# Altium PCB PCB1.pcbdoc
Units mil, origin at the board's own origin, x right, y up, seen from the top; angles counter-clockwise.
Board outline 1968.5 x 1968.5 mil, 2 copper layers (Top Layer, Bottom Layer); 70 components, 64 nets, 269 pads, 219 vias.
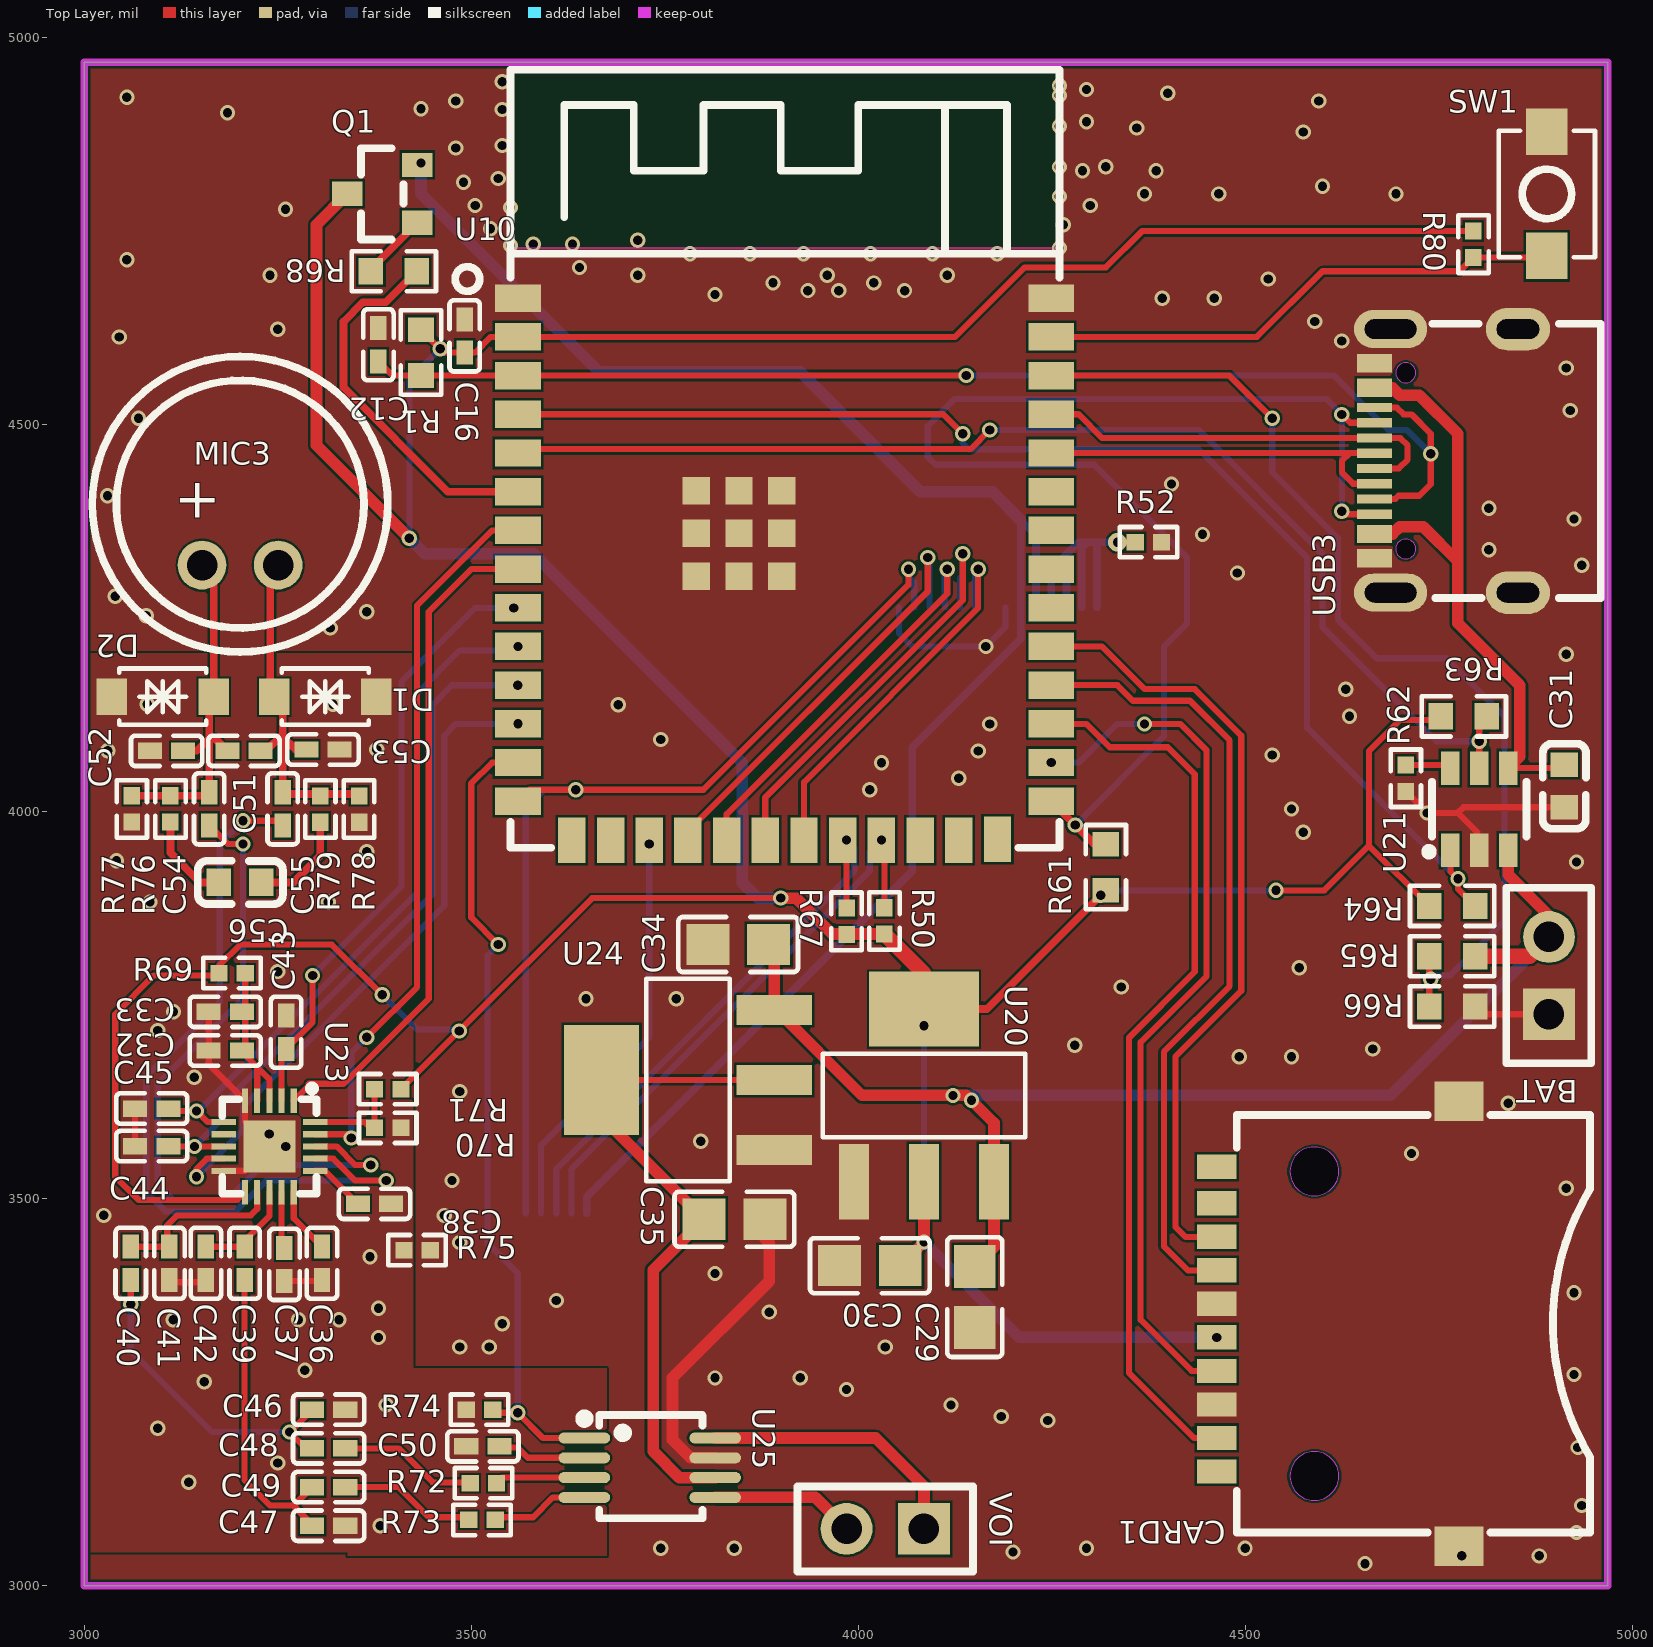
[diagram p0: Top Layer view]
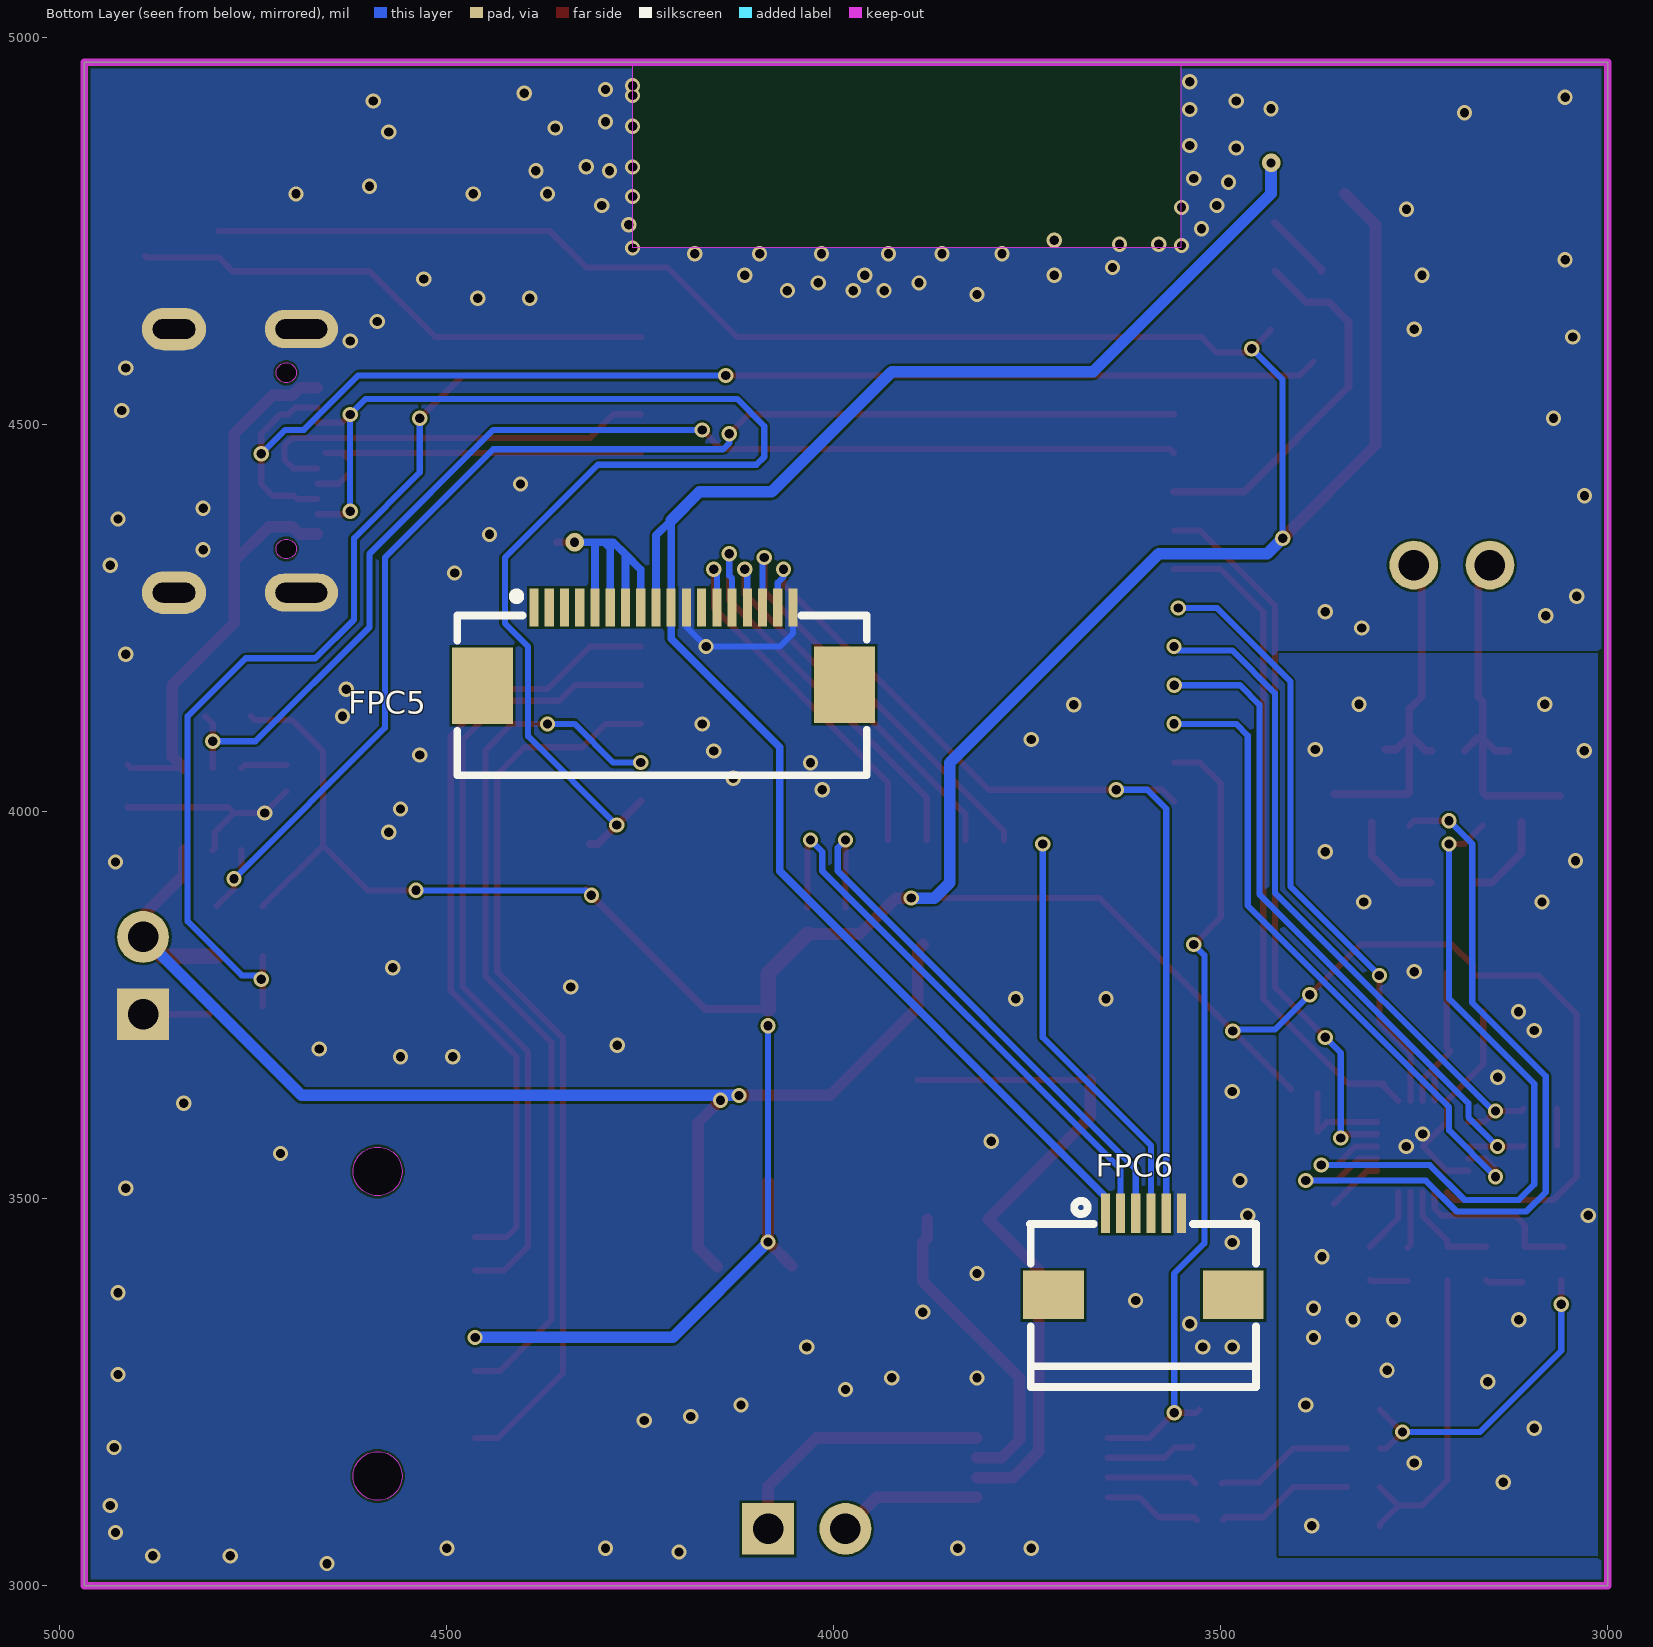
[diagram p1: Bottom Layer view, seen from below]

## Layer stack, top to bottom
Top Solder Mask Layer: solder mask 0.4, Solder Resist, Dk 3.5
Top Layer: signal copper 1.4
Dielectric1: dielectric 12.6, FR-4, Dk 4.8
Bottom Layer: signal copper 1.4
Bottom Solder Mask Layer: solder mask 0.4, Solder Resist, Dk 3.5

## Board outline
3000,3000 4968.5,3000 4968.5,4968.5 3000,4968.5

## Design rules (kind name [scope] priority, off if disabled: settings)
Clearance [All] p1: gap=3 ignorepadtopadclearanceinfootprint=FALSE
ComponentClearance [All] p1: gap=0 collisioncheckmode=3 verticalgap=0 showdistances=TRUE
PolygonConnect PolygonConnect_1 [All vs IsNamedPolygon('Top Layer-GND') Or  IsNamedPolygon('Bottom Layer-GND') Or  IsNamedPolygon('Top Layer-AGND 1') Or  IsNamedPolygon('Bottom Layer-AGND') Or  IsNamedPolygon('Top Layer-AGND')] p1: connectstyle=Direct reliefconductorwidth=10 reliefentries=4 polygonreliefangle="90 Angle" airgapwidth=10
PolygonConnect [All] p2: connectstyle=Relief reliefconductorwidth=10 reliefentries=4 polygonreliefangle="90 Angle" airgapwidth=10
RoutingVias [All] p1: holewidth=28 width=50 viastyle="Through Hole" minholewidth=12 minwidth=12 maxholewidth=28 maxwidth=50
SilkToSilkClearance [All] p1: silktosilkclearance=3
SolderMaskExpansion [All] p1: expansion=4
Width [All] p1: maxlimit=30 minlimit=5 preferedwidth=10
28 further rules are at their usual default settings.

## Components (designator, comment, footprint, x,y, rotation, side; value= is the part's Value field where it differs from the comment)
BAT "HDR-F_2.54_1x2P" HDR-TH_2P-P2.54-V-F 4892.61,3788.39 r90 top
C12 "CL05B104KO5NNNC" C0402 3380,4603.5 r90 top
C16 "CL05B104KO5NNNC" C0402 3491.46,4614.96 r270 top
C29 "0805B104K500NT" C0805 4150.63,3372.87 r90 top
C30 "0805B104K500NT" C0805 4015,3413.5 r0 top
C31 "CAP_0603" C0603 4912.61,4033.39 r90 top
C32 "CAP_0402" C0402 3182.14,3691.58 r180 top
C33 "CAP_0402" C0402 3182.14,3741.58 r180 top
C34 "0805B104K500NT" C0805 3845,3828.5 r0 top
C35 "0805B104K500NT" C0805 3840,3473.5 r180 top
C36 "CAP_0402" C0402 3307.14,3416.58 r270 top
C37 "CAP_0402" C0402 3258.6,3415.12 r270 top
C38 "CAP_0402" C0402 3375,3493.5 r0 top
C39 "CAP_0402" C0402 3207.14,3416.58 r270 top
C40 "CAP_0402" C0402 3060,3416.58 r270 top
C41 "CAP_0402" C0402 3110,3416.58 r90 top
C42 "CAP_0402" C0402 3157.14,3416.58 r90 top
C43 "CAP_0402" C0402 3260.68,3715.12 r90 top
C44 "CAP_0402" C0402 3087.14,3568.04 r0 top
C45 "CAP_0402" C0402 3087.14,3616.58 r0 top
C46 "CAP_0402" C0402 3315.7,3227.44 r180 top
C47 "CAP_0402" C0402 3315.7,3077.44 r180 top
C48 "CAP_0402" C0402 3315.7,3177.44 r0 top
C49 "CAP_0402" C0402 3315.7,3127.44 r0 top
C50 "CAP_0402" C0402 3515.02,3180.07 r0 top
C51 "CAP_0402" C0402 3206.3,4078.79 r180 top
C52 "CAP_0402" C0402 3106.3,4078.79 r180 top
C53 "CAP_0402" C0402 3308.42,4080.53 r180 top
C54 "CAP_0402" C0402 3161.3,4003.79 r90 top
C55 "CAP_0402" C0402 3256.3,4003.79 r90 top
C56 "CAP_0402" C0603 3201.3,3908.79 r180 top
CARD1 "SD-111" SD-SMD_SD-01A 4620,3338.5 r90 top
D1 "SMFJ3.3CA" SOD-123_L2.7-W1.6-LS3.7-BI 3311.3,4148.79 r180 top
D2 "SMFJ3.3CA" SOD-123_L2.7-W1.6-LS3.7-BI 3101.3,4148.79 r180 top
FPC5 "FPC-05F-18PH20" FPC-SMD_18P-P0.50_FPC-05F-18PH20 4220,4213.5 r180 bottom
FPC6 "AFC01-S06FCA-00" FPC-SMD_P0.50-6P_AFC01-S06FCA-00 3600,3428.5 r180 bottom
MIC3 "GMI9750UP-2C40DB" MIC-TH_BD9.7-P2.50-D0.8-L-FD 3201.3,4318.79 r0 top
Q1 "S8050_SOT_NPN" S8050_SOT-23 3385,4793.5 r0 top
R1 "0603WAF1002T5E" R0603 3435,4593.5 r90 top
R50 "0402WGF4701TCE" R0402 4033.9,3859.09 r270 top
R52 "0402WGF100JTCE" R0402 4375,4348.5 r0 top
R61 "0603WAF1002T5E" R0603 4320,3928.5 r90 top
R62 "Res_0402" R0402 4707.61,4043.39 r270 top
R63 "Res_0603" R0603 4782.61,4123.39 r180 top
R64 "Res_0603" R0603 4767.61,3878.39 r180 top
R65 "Res_0603" R0603 4767.61,3813.39 r0 top
R66 "Res_0603" R0603 4767.61,3748.39 r0 top
R67 "0402WGF4701TCE" R0402 3985,3858.5 r270 top
R68 "Res_0603" R0603 3400,4698.5 r180 top
R69 "Res_0402" R0402 3190.98,3791.58 r0 top
R70 "Res_0402" R0402 3392.14,3591.58 r0 top
R71 "Res_0402" R0402 3392.14,3641.58 r180 top
R72 "Res_0402" R0402 3515.7,3132.44 r0 top
R73 "Res_0402" R0402 3513.89,3085.02 r0 top
R74 "Res_0402" R0402 3510.7,3227.44 r0 top
R75 "Res_0402" R0402 3430,3433.5 r0 top
R76 "Res_0402" R0402 3111.3,4003.79 r270 top
R77 "Res_0402" R0402 3061.3,4003.79 r270 top
R78 "Res_0402" R0402 3355,4003.5 r270 top
R79 "Res_0402" R0402 3305,4003.5 r270 top
R80 "Res_0402" R0402 4795,4733.5 r270 top
SW1 "Key_SMD_3x4x2" Key_SMD_3x4x2 4890,4798.5 r90 top
U10 "ESP32-S3-WROOM-1-N16R8" WIRELM-SMD_ESP32-S3-WROOM-1 3905,4313.5 r0 top (schematic designator U1)
U20 "AMS1117-3.3_C347222" SOT-223-4_L6.5-W3.5-P2.30-LS7.0-BR 4085,3633.5 r270 top
U21 "TP4057" SOT-23-6_L2.9-W1.6-P0.95-LS2.8-BR 4802.61,4003.39 r270 top
U23 "ES8311" WQFN-20_L3.0-W3.0-P0.40-BL-EP1.7 3239.15,3567.55 r180 top
U24 "AMS1117-3.3_C347222" SOT-223-4_L6.5-W3.5-P2.30-LS7.0-BR 3780,3653.5 r0 top
U25 "NS4150B_C189961" MSOP-8_L3.0-W3.0-P0.65-LS5.0-BL 3730.7,3152.44 r270 top
USB3 "TYPE-C16P3MDDGP073" USB-SMD_TYPE-C16PIN-1 4760,4453.5 r90 top
VOI "HDR-F_2.54_1x2P" HDR-TH_2P-P2.54-V-F 4035,3073.5 r180 top

## Footprints (in the part's own frame and the unit in brackets; to place one, negate y for a bottom-side part, rotate by r counter-clockwise, add the part's x,y. Pads: shape width x height; smd on the part's side, far side on the other; paste and mask are expansions set on the pad)
C0402 [mm]
  rect 0.79x0.54 smd paste-100 mask+0.051: 1(-0.545,0) 2(0.545,0)
  silkscreen extent -1.17,-0.5 1.17,0.5
C0603 [mm]
  rect 0.8x0.9 smd: 1(-0.7,0) 2(0.7,0)
  silkscreen extent -1.41,-0.71 1.39,0.72
C0805 [mm]
  rect 1.41x1.35 smd paste-100 mask+0.051: 1(-1,0) 2(1,0)
  silkscreen extent -1.96,-0.9 1.96,0.9
FPC-SMD_18P-P0.50_FPC-05F-18PH20 [mm]
  rect 0.3x1.25 smd paste+0 mask+0.05: 1(-4.25,1.288) 2(-3.75,1.288) 3(-3.25,1.288) 4(-2.75,1.288) 5(-2.25,1.288) 6(-1.75,1.288) 7(-1.25,1.288) 8(-0.75,1.288) 9(-0.25,1.288) 10(0.25,1.288) 11(0.75,1.288) 12(1.25,1.288) 13(1.75,1.287) 14(2.25,1.287) 15(2.75,1.287) 16(3.25,1.287) 17(3.75,1.287) 18(4.25,1.287)
  rect 2x2.5 smd paste+0 mask+0.05: 19(-5.94,-1.288) 20(5.94,-1.252)
  silkscreen extent -6.77,-4.22 6.67,1.78
FPC-SMD_P0.50-6P_AFC01-S06FCA-00 [mm]
  rect 0.3x1.3 smd: 1(-1.248,1.339) 2(-0.748,1.339) 3(-0.248,1.339) 4(0.252,1.339) 5(0.752,1.339) 6(1.252,1.339)
  rect 2x1.6 smd: 7(-2.95,-1.339) 8(2.95,-1.339)
  silkscreen extent -3.72,-4.36 3.7,1.75
HDR-TH_2P-P2.54-V-F [mm]
  rect 1.7x1.7 hole 1: 1(-1.27,0)
  round 1.7 hole 1: 2(1.27,0)
  silkscreen extent -2.88,-1.39 2.88,1.4
Key_SMD_3x4x2 [mm]
  rect 1.53x1.36 smd paste+0 mask+0.051: 1(-2.035,0) 2(2.035,0)
  silkscreen extent -2.08,-1.58 2.08,1.58
MIC-TH_BD9.7-P2.50-D0.8-L-FD [mm]
  round 1.6 hole 1: 1(-1.25,0) 2(1.25,0)
  silkscreen extent -4.85,-2.85 4.85,6.85
MSOP-8_L3.0-W3.0-P0.65-LS5.0-BL [mil]
  oval 14.33x66.61 smd: 1(-38.39,-84.49) 2(-12.79,-84.49) 3(12.8,-84.49) 4(38.39,-84.49) 5(38.39,84.49) 6(12.8,84.49) 7(-12.79,84.49) 8(-38.39,84.49)
  silkscreen extent -69,-90 65,68
R0402 [mm]
  rect 0.566x0.54 smd paste-100 mask+0.051: 1(-0.433,0) 2(0.433,0)
  silkscreen extent -0.94,-0.5 0.94,0.5
R0603 [mil]
  rect 31.75x34.02 smd paste-3937.01 mask+2: 1(-29.66,0) 2(29.66,0)
  silkscreen extent -55,-26 55,26
S8050_SOT-23 [mm]
  rect 1x0.8 smd paste+0 mask+0.051: 1(1.15,-0.823) 2(1.15,1.077) 3(-1.15,0.127)
  silkscreen extent -0.7,-1.37 0.7,1.63
SD-SMD_SD-01A [mm]
  rect 0.8x1.3 smd: 1(2.85,3.975) 2(1.75,3.975) 3(0.65,3.975) 4(-0.45,3.975) 5(-1.55,3.975) 6(-2.65,3.975) 7(-3.75,3.975) 8(-4.85,3.975) SW1(3.95,3.975) SW2(5.15,3.975)
  rect 1.3x1.6 smd: 11(7.3,-3.975) 12(-7.3,-3.975)
  Board Outline Layer board cut-out: -5,-0.025 -4.895,-0.024 -4.693,0.031 -4.511,0.137 -4.363,0.285 -4.259,0.467 -4.205,0.67 -4.205,0.88 -4.259,1.083 -4.363,1.265 -4.511,1.414 -4.693,1.519 -4.895,1.574 -5,1.575 -5.105,1.574 -5.307,1.519 -5.489,1.414 -5.637,1.265 -5.741,1.083 -5.796,0.88 -5.796,0.67 -5.741,0.467 -5.637,0.285 -5.489,0.137 -5.307,0.031 -5.105,-0.024 -5,-0.025
  Board Outline Layer board cut-out: 5,-0.025 5.105,-0.024 5.307,0.031 5.489,0.137 5.637,0.285 5.741,0.467 5.795,0.67 5.795,0.88 5.741,1.083 5.637,1.265 5.489,1.414 5.307,1.519 5.105,1.574 5,1.575 4.895,1.574 4.692,1.519 4.511,1.414 4.363,1.265 4.259,1.083 4.204,0.88 4.204,0.67 4.259,0.467 4.363,0.285 4.511,0.137 4.693,0.031 4.895,-0.024 5,-0.025
  Multi-Layer keep-out region: -5,-0.025 -4.895,-0.024 -4.693,0.031 -4.511,0.137 -4.363,0.285 -4.259,0.467 -4.205,0.67 -4.205,0.88 -4.259,1.083 -4.363,1.265 -4.511,1.414 -4.693,1.519 -4.895,1.574 -5,1.575 -5.105,1.574 -5.307,1.519 -5.489,1.414 -5.637,1.265 -5.741,1.083 -5.796,0.88 -5.796,0.67 -5.741,0.467 -5.637,0.285 -5.489,0.137 -5.307,0.031 -5.105,-0.024 -5,-0.025
  Multi-Layer keep-out region: 5,-0.025 5.105,-0.024 5.307,0.031 5.489,0.137 5.637,0.285 5.741,0.467 5.795,0.67 5.795,0.88 5.741,1.083 5.637,1.265 5.489,1.414 5.307,1.519 5.105,1.574 5,1.575 4.895,1.574 4.692,1.519 4.511,1.414 4.363,1.265 4.259,1.083 4.204,0.88 4.204,0.67 4.259,0.467 4.363,0.285 4.511,0.137 4.693,0.031 4.895,-0.024 5,-0.025
  silkscreen extent -6.85,-8.28 6.85,3.32
SOD-123_L2.7-W1.6-LS3.7-BI [mm]
  rect 1x1.2 smd: 1(-1.675,0) 2(1.675,0)
  silkscreen extent -1.43,-0.93 1.43,0.93
SOT-23-6_L2.9-W1.6-P0.95-LS2.8-BR [mm]
  rect 1.1x0.6 smd paste+0 mask+0.051: 1(1.35,-0.95) 2(1.35,0) 3(1.35,0.95) 4(-1.35,0.95) 5(-1.35,0) 6(-1.35,-0.95)
  silkscreen extent -0.9,-1.78 1.52,1.55
SOT-223-4_L6.5-W3.5-P2.30-LS7.0-BR [mm]
  rect 2.47x0.98 smd: 1(2.835,-2.3) 2(2.835,0) 3(2.835,2.3)
  rect 2.47x3.6 smd: 4(-2.835,0)
  silkscreen extent -1.37,-3.33 1.37,3.33
USB-SMD_TYPE-C16PIN-1 [mm]
  oval 1.25x2.4 hole 0.65 slot 1.7 at 90 deg paste+0 mask+0.05: 17(-4.325,1.828) 18(4.325,1.828)
  oval 1.4x2.1 hole 0.65 slot 1.4 at 90 deg paste+0 mask+0.05: 19(-4.325,-2.353) 20(4.325,-2.353)
  rect 0.6x1.15 smd paste-100 mask+0.051: A1B12(-3.2,2.353) A4B9(-2.4,2.353) B1A12(3.2,2.353) B4A9(2.4,2.353)
  rect 0.3x1.15 smd paste-100 mask+0.051: A5(-1.25,2.353) A6(-0.25,2.353) A7(0.25,2.353) A8(1.25,2.353) B5(1.75,2.353) B6(0.75,2.353) B7(-0.75,2.353) B8(-1.75,2.353)
  Board Outline Layer board cut-out: 2.89,1.003 2.955,1.003 3.074,1.052 3.166,1.144 3.215,1.263 3.215,1.392 3.165,1.512 3.074,1.603 2.955,1.653 2.89,1.653 2.825,1.653 2.706,1.603 2.614,1.512 2.565,1.392 2.565,1.263 2.614,1.144 2.706,1.052 2.825,1.003 2.89,1.003
  Board Outline Layer board cut-out: -2.89,1.003 -2.825,1.003 -2.706,1.052 -2.615,1.144 -2.565,1.263 -2.565,1.392 -2.615,1.512 -2.706,1.603 -2.825,1.653 -2.89,1.653 -2.955,1.653 -3.074,1.603 -3.166,1.512 -3.215,1.392 -3.215,1.263 -3.166,1.144 -3.074,1.052 -2.955,1.003 -2.89,1.003
  Multi-Layer keep-out region: 2.89,1.003 2.955,1.003 3.074,1.052 3.166,1.144 3.215,1.263 3.215,1.392 3.165,1.512 3.074,1.603 2.955,1.653 2.89,1.653 2.825,1.653 2.706,1.603 2.614,1.512 2.565,1.392 2.565,1.263 2.614,1.144 2.706,1.052 2.825,1.003 2.89,1.003
  Multi-Layer keep-out region: -2.89,1.003 -2.825,1.003 -2.706,1.052 -2.615,1.144 -2.565,1.263 -2.565,1.392 -2.615,1.512 -2.706,1.603 -2.825,1.653 -2.89,1.653 -2.955,1.653 -3.074,1.603 -3.166,1.512 -3.215,1.392 -3.215,1.263 -3.166,1.144 -3.074,1.052 -2.955,1.003 -2.89,1.003
  silkscreen extent -4.5,-5.07 4.5,0.47
WIRELM-SMD_ESP32-S3-WROOM-1 [mm]
  rect 1.5x0.9 smd paste+0 mask+0.05: 1(-8.75,8.895) 2(-8.75,7.625) 3(-8.75,6.355) 4(-8.75,5.085) 5(-8.75,3.815) 6(-8.75,2.545) 7(-8.75,1.275) 8(-8.75,0.005) 9(-8.75,-1.265) 10(-8.75,-2.535) 11(-8.75,-3.805) 12(-8.75,-5.075) 13(-8.75,-6.345) 14(-8.75,-7.615) 27(8.75,-7.615) 28(8.75,-6.345) 29(8.75,-5.075) 30(8.75,-3.805) 31(8.75,-2.535) 32(8.75,-1.265) 33(8.75,0.005) 34(8.75,1.275) 35(8.75,2.545) 36(8.75,3.815) 37(8.75,5.085) 38(8.75,6.355) 39(8.75,7.625) 40(8.75,8.895)
  rect 0.9x1.5 smd paste+0 mask+0.05: 15(-6.985,-8.895) 16(-5.715,-8.895) 17(-4.445,-8.895) 18(-3.175,-8.895) 19(-1.905,-8.895) 20(-0.635,-8.895) 21(0.635,-8.895) 22(1.905,-8.895) 23(3.175,-8.895) 24(4.445,-8.895) 25(5.715,-8.895) 26(6.985,-8.865)
  rect 0.9x0.9 smd: 41(-2.9,-0.225) 41(-2.9,1.175) 41(-2.9,2.575) 41(-1.5,-0.225) 41(-1.5,1.175) 41(-1.5,2.575) 41(-0.1,-0.225) 41(-0.1,1.175) 41(-0.1,2.575)
  silkscreen extent -10.81,-9.14 9.02,16.39
WQFN-20_L3.0-W3.0-P0.40-BL-EP1.7 [mm]
  rect 0.2x0.8 smd paste-100 mask+0.051: 1(-0.8,-1.5) 2(-0.4,-1.5) 3(0,-1.5) 4(0.4,-1.5) 5(0.8,-1.5) 11(0.8,1.5) 12(0.4,1.5) 13(0,1.5) 14(-0.4,1.5) 15(-0.8,1.5)
  rect 0.8x0.2 smd paste-100 mask+0.051: 6(1.5,-0.8) 7(1.5,-0.4) 8(1.5,0) 9(1.5,0.4) 10(1.5,0.8) 16(-1.5,0.8) 17(-1.5,0.4) 18(-1.5,0) 19(-1.5,-0.4) 20(-1.5,-0.8)
  rect 1.7x1.7 smd paste-100 mask+0.051: 21(0,0)
  silkscreen extent -1.55,-2 1.55,1.55

## Via types
v1: diameter 19.7, hole 12, Top Layer to Bottom Layer, 216 vias
v2: diameter 24, hole 12, Top Layer to Bottom Layer, 2 vias
v3: diameter 19.68, hole 12, Top Layer to Bottom Layer, 1 vias

## Nets (pads, with @x,y where several pads share a name; then routed paths per layer and width w, separated by ;. In a path a pad name is that pad's centre, name@x,y a point inside that pad or via, vN(x,y) a via of type N, cw(c..) or ccw(c..) an arc to the next point about the centre after c; other vN are vias at no path point)
$1N2727: FPC5.5 FPC5.6 FPC5.7 FPC5.8 R52.1 | length 412.7
  Top Layer w10: v2(4335,4348.5) R52.1
  Bottom Layer w10: FPC5.8 4249.53,4313.03 4269.21,4332.71 ; FPC5.7 4269.21,4332.71 ; FPC5.6 4288.9,4340.76 4296.64,4348.5 ; FPC5.5 4308.58,4347.6 4309.48,4348.5 ; v2(4335,4348.5) 4309.48,4348.5 ; 4269.21,4332.71 4285,4348.5 4296.64,4348.5 ; 4296.64,4348.5 4309.48,4348.5
$1N4323: R62.1 U21.6 | length 59.2
  Top Layer w8: R62.1 4761.32,4060.43 U21.6
$1N5174: Q1.1 R68.2 | length 87.4
  Top Layer w10: R68.2 3370.34,4701.17 Q1.1
$1N5941: C32.1 C33.1 R69.2 U23.3 U23.4 | length 225
  Top Layer w8: R69.2 3208.02,3695.99 C32.1 3203.6,3689.9 3223.39,3670.11 ; U23.4 3223.39,3670.11 ; U23.3 3239.14,3654.36 3223.39,3670.11
$1N6295: R70.1 R71.2 U23.20 | length 132.1
  Top Layer w8: U23.20 3362.63,3599.05 3375.1,3586.58 R71.2@3375.1,3636.58
$1N6820: C36.1 U23.15 | length 85.6
  Top Layer w8: U23.15 3270.64,3474.53 C36.1
$1N6846: C37.1 U23.14 | length 73.5
  Top Layer w8: U23.14 3254.89,3440.28 C37.1
$1N6915: C38.1 U23.16 | length 73
  Top Layer w8: U23.16 3310.99,3536.06 C38.1
$1N7076: C40.1 C41.2 U23.12 | length 224.3
  Top Layer w8: C40.1@3057.14,3438.04 3107.14,3438.04 3107.14,3465.64 3120,3478.5 3215,3478.5 3223.39,3486.9 U23.12
$1N7092: C39.1 C42.2 U23.13 | length 133.7
  Top Layer w8: C42.2 C39.1 3207.14,3445.64 3239.14,3477.65 U23.13
$1N7712: R72.2 U25.3 | length 116.5
  Top Layer w8: R72.2 3539.94,3139.64 U25.3
$1N7715: R73.2 U25.4 | length 127.3
  Top Layer w8: R73.2 3534.42,3088.5 3580,3088.5 3605.55,3114.05 U25.4
$1N7717: C49.2 R73.1 | length 177.3
  Top Layer w8: C49.2 3406.06,3127.44 3445,3088.5 3493.36,3088.5 R73.1
$1N7719: C48.2 R72.1 | length 180.1
  Top Layer w8: C48.2 3406.06,3177.44 3450,3133.5 3497.59,3133.5 R72.1
$1N7799: C50.2 U25.2 | length 115.9
  Top Layer w8: C50.2 3538.05,3178.5 3560,3178.5 3573.27,3165.23 U25.2
$1N8573: C51.2 C52.1 C54.2 D2.1 MIC3.1 R76.1 R77.1 | length 474.4
  Top Layer w10: R77.1 R76.1 3156.88,4020.83 C54.2 3161.3,4094.73 ; C52.1 3145.36,4078.79 3161.3,4094.73 ; MIC3.1 3167.24,4303.64 D2.1 3161.3,4142.85 3161.3,4094.73 ; C51.2 3168.9,4094.73 3161.3,4094.73
$1N8649: C51.1 C53.2 C55.2 D1.2 MIC3.2 R78.1 R79.1 | length 477.4
  Top Layer w10: C51.1 3234.74,4078.79 3256.3,4100.35 ; MIC3.2 3240.36,4308.64 3240.36,4148.79 3256.3,4132.85 3256.3,4100.35 ; C53.2 3272.98,4080.53 3256.3,4097.2 ; R78.1@3353.34,4022.87 3258.68,4022.87 C55.2 3256.3,4097.2 ; 3256.3,4097.2 3256.3,4100.35
$1N8733: C56.2 R76.2 | length 118.1
  Top Layer w10: R76.2 3111.3,3947.2 3150,3908.5 3150.29,3908.79 C56.2
$1N8737: C56.1 R79.2 | length 133.5
  Top Layer w10: C56.1 3270.29,3908.79 3305,3943.5 R79.2
+5V: BAT.2 C29.2 C34.2 R65.2 U20.3 U21.3 U24.3 | length 1719.7
  Top Layer w15: C34.2 3891.61,3821.26 U24.3 3894.45,3744.05 4005,3633.5 v1(4122.48,3633.5) 4140,3633.5 4175.55,3597.95 U20.3 4175.55,3437.16 C29.2 ; U21.3 4840.01,3918.49 4892.61,3865.89 BAT.2
  Top Layer w20: R65.2 4867.61,3813.39 BAT.2
  Bottom Layer w15: v1@4125,3633.5 4687.73,3633.5 BAT.2
  other v1: 4146.32,3627.19
AGND: C32.2 C33.2 C36.2 C37.2 C38.2 C41.1 C42.1 C43.2 C44.1 C45.1 C46.1 C47.1 C50.1 C52.2 C53.1 D1.1 D2.2 R70.2 R74.1 R75.1 R77.2 R78.2 U23.5 U23.10 U23.21 | length 424.7
  Top Layer w8: C44.1 C45.1 ; C41.1@3110,3392.04 3154.07,3392.04 C42.1 ; C33.2 C32.2 3160.68,3673.57 U23.5 3207.64,3599.06 U23.21 3207.65,3536.07 U23.10 ; C37.2 3305.68,3393.66 C36.2
  other v1: 3382.37,3077.44 3135,3133.5 3250,3158.5 3095,3203.5 3390,3233.5 3155,3263.5 3285,3278.5 3380,3320.64 3115,3343.5 3276.67,3343.5 3329.08,3343.5 3380,3358.5 3369.1,3425.06 3025,3478.5 3260.24,3567.55 3239.15,3583.54 3142.13,3657.04 3095,3717.44 3115.2,3741.58 3250,3793.5 3085,3883.5 3315.31,3883.5 3041.67,3936.89 3365,3948.5 3030.19,4078.79 3377.93,4080.53 3081.34,4138.89 3321.34,4138.89
ASDOUT: U23.7
BATV: R65.1 R66.1 U10.38 | length 1326.4
  Top Layer w8: U10.38 4479.81,4563.7 v1(4535,4508.5) ; R66.1 R65.1
  Bottom Layer w8: v1(4535,4508.5) 4535,4438.5 4620,4353.5 4620,4248.5 4670,4198.5 4760,4198.5 4835,4123.5 4835,3858.5 4765,3788.5 4745,3788.5 v1(4740,3783.5)
CS: FPC5.14 U10.20 | length 546.6
  Top Layer w8: U10.20 3880,4018.5 4135,4273.5 v1(4135,4333.5)
  Bottom Layer w8: FPC5.14 4131.42,4301.56 4135,4305.14 v1(4135,4333.5)
DS: FPC5.15 U10.19 | length 518.9
  Top Layer w8: U10.19 3830,3996.84 4115,4281.84 v1(4115,4313.5)
  Bottom Layer w8: FPC5.15 4111.74,4310.24 v1(4115,4313.5)
DSIN: U10.12 U23.9 | length 855
  Top Layer w8: v1(3145,3528.5) 3145,3538.5 3158.31,3551.82 U23.9
  Bottom Layer w8: v1(3145,3528.5) 3205,3588.5 3205,3618.5 3465,3878.5 3465,4098.5 3480,4113.5 3560.32,4113.5 v1(3560.51,4113.7)
ESCLK: U10.8 U23.1 | length 868.9
  Top Layer w8: U23.1 3290,3645.96 3290,3648.5 3335,3648.5 3445,3758.5 3445,4258.5 3500.2,4313.7 U10.8
ESDAT: U10.7 U23.19 | length 942.9
  Top Layer w8: U23.19 3340.21,3583.3 v1(3345,3578.5) ; v1(3365,3708.5) 3430,3773.5 3430,4266.72 3526.98,4363.7 U10.7
  Bottom Layer w8: v1(3345,3578.5) 3345,3688.5 v1(3365,3708.5)
EVCC: C35.2 U24.2 U24.4 U25.6 | length 879.4
  Top Layer w8: U24.4 U24.2
  Top Layer w15: U24.4 3668.39,3605.74 C35.2 3735,3407.87 3735,3173.5 3768.86,3139.64 U25.6
GND: BAT.1 C12.2 C16.1 C29.1 C30.1 C31.1 C34.1 C35.1 CARD1.3 CARD1.6 CARD1.11 CARD1.12 FPC5.11 FPC5.18 FPC6.6 R52.2 R62.2 R66.2 R75.2 SW1.2 U10.1 U10.40 U10.41 U20.1 U21.2 U24.1 U25.7 USB3.17 USB3.18 USB3.19 USB3.20 USB3.A1B12 USB3.B1A12 | length 996.8
  Top Layer w8: R62.2 v1(4735.46,3998.5) 4775,3998.5 ; R66.2 4807.27,3738.39 BAT.1 ; U21.2 4800,3952.85 4800,3973.5 4775,3998.5 ; C31.1 4782.33,4005.83 4775,3998.5
  Top Layer w15: U25.7 3783.27,3165.23 3760,3188.5 3760,3268.5 3885,3393.5 3885,3443.5 3879.37,3449.13 C35.1
  Bottom Layer w8: FPC5.18 4052.68,4230.82 4070,4213.5 v1(4165,4213.5) 4190.47,4238.97 FPC5.11
  other v1: 4655,3028.5 4780,3038.5 4880,3038.5 4200,3043.5 3745,3048.5 3840,3048.5 4295,3048.5 4500,3048.5 4928.18,3068.82 4935,3103.5 4930,3178.5 4245,3213.5 4185,3218.5 4120,3233.5 3985,3253.5 3815,3268.5 3925,3268.5 4925,3272.9 3485,3308.5 3523.15,3308.5 4035,3308.5 3540,3338.5 3885,3353.5 3610,3368.5 4925,3378.5 3815,3403.5 3485,3443.5 3465,3478.5 4915,3513.5 3475,3523.5 4715,3558.5 3796.45,3574.4 4840,3623.5 3485,3638.5 4492.57,3683.5 4560,3683.5 4665,3693.5 4280,3698.5 3648.21,3758.5 3765,3758.5 4340,3773.5 4570,3798.5 4928.14,3935.24 4575,3973.5 4560,4003.5 4015,4028.5 4130,4043.5 4030,4063.5 4535,4073.5 4155,4078.5 3745,4093.5 4170,4113.5 4635,4123.5 3690,4138.5 4630,4158.5 4915,4203.5 3317.71,4237.53 3080,4253.5 3365,4258.5 3040,4278.5 4490,4308.5 4935,4318.5 4815,4338.5 4445,4358.5 4925,4378.5 4815,4392.36 3030,4408.5 4405,4423.5 3070,4508.5 4920,4518.5 4915,4573.5 4625,4608.5 3045,4613.5 3250,4623.5 4590,4633.5 4392.98,4663.5 4460,4663.5 3815,4668.5 3935,4673.5 3975,4673.5 4060,4673.5 3890,4683.5 4020,4683.5 4530,4688.5 3240,4693.5 3715,4693.5 3960,4693.5 4115,4693.5 3640,4703.5 3055,4713.5 3782.79,4721.19 3860.07,4721.19 3929.35,4721.19 4015.95,4721.19 4095.89,4721.19 4179.83,4721.19 4260,4728.5 3550.67,4731.77 3580,4733.5 3630.91,4733.5 3715,4738.5 3525,4753.5 4265,4758.5 3260,4778.5 3550.67,4781.06 3505,4783.5 4300,4783.5 4260,4795.16 4370,4798.5 4465.88,4798.5 4695,4798.5 4600,4808.5 3490,4813.5 3535,4818.5 4290,4828.5 4385,4828.5 4260,4833.36 4320,4833.5 3480,4857.84 3540,4861 4575,4878.5 4360,4883.5 4260,4885.76 4295,4891.82 3185,4903.5 3540,4907.63 3435,4908.5 3480,4918.5 4595,4918.5 3055,4923.5 4260,4925.73 4400,4928.5 4295,4933.5 4260,4938.17 3540,4943.5
GPIO0: R61.2 U10.27 USB3.A8 USB3.B8 | length 1696.8
  Top Layer w8: v1(4625,4388.5) 4628.9,4384.6 USB3.B8 ; v1(4625,4513.5) 4635.79,4502.71 USB3.A8
  Top Layer w10: U10.27 v1(4280.34,3982.85) 4304.69,3958.5 R61.2@4315.34,3958.5
  Bottom Layer w8: v1(4280.34,3982.85) 4395,4097.51 4395,4213.5 4425,4243.5 4425,4328.5 4305,4448.5 4100,4448.5 4090,4458.5 4090,4498.5 4125,4533.5 4605,4533.5 v1(4625,4513.5) v1(4625,4388.5)
GPIO1: R80.2 SW1.1 U10.39 | length 683.9
  Top Layer w8: U10.39 4515.19,4613.7 4600,4698.5 4777.04,4698.5 R80.2 4888.08,4716.46 SW1.1
GPIO3: U10.15
GPIO4: R64.1 U10.4 U21.1 | length 1684.1
  Top Layer w8: U10.4 4109.81,4513.7 v1(4135,4488.5) ; U21.1 4765.21,3923.29 v1(4775,3913.5) 4775,3900.66 R64.1
  Bottom Layer w8: v1(4135,4488.5) 4135,4476.5 4143,4468.5 4440,4468.5 4580,4328.5 4580,4108.5 v1(4775,3913.5)
GPIO5: R63.1 U10.5 U21.5 | length 1547.6
  Top Layer w8: U10.5 3565.47,4468.65 4145.15,4468.65 v1(4170,4493.5) ; U21.5 v1(4802.61,4091.15) 4802.61,4113.73 R63.1
  Bottom Layer w8: v1(4170,4493.5) 4440,4493.5 4600,4333.5 4600,4238.5 4747.35,4091.15 v1(4802.61,4091.15)
GPIO6: R68.1 U10.6 | length 487.9
  Top Layer w10: R68.1 3389.66,4658.5 3360,4658.5 3335,4633.5 3335,4548.5 3469.8,4413.7 U10.6
GPIO9: FPC6.4 U10.17 | length 535.2
  Bottom Layer w8: FPC6.4 3590.07,3568.58 3730,3708.5 v1(3730,3958.5)
GPIO10: FPC5.16 U10.18 | length 558.8
  Top Layer w8: U10.18 3780,3974.7 4090,4284.69 v3(4090,4328.5)
  Bottom Layer w8: v3(4090,4328.5) 4092.05,4326.45 FPC5.16
GPIO13: FPC5.13 U10.21 | length 494.3
  Top Layer w8: U10.21 3930,4038.5 4155,4263.5 v1(4155,4313.5)
  Bottom Layer w8: FPC5.13 4151.11,4309.61 v1(4155,4313.5)
GPIO14: FPC6.3 R67.1 U10.22 | length 735.8
  Top Layer w8: U10.22 3985,3958.31 R67.1
  Bottom Layer w8: FPC6.3 3609.76,3538.27 3995,3923.5 3995,3953.5 v1(3985,3963.5)
GPIO16: C43.1 U10.9 U23.2 | length 790.5
  Top Layer w8: U23.2 3254.89,3687.87 C43.1 3295,3727.98 v1(3295,3788.5)
  Bottom Layer w8: v1(3295,3788.5) 3410,3903.5 3410,4168.5 3505,4263.5 v1(3555,4263.5)
GPIO17: C45.2 U10.10 U23.6 | length 894
  Top Layer w8: C45.2 3111.67,3613.5 v1(3145,3613.5) 3159.45,3599.06 U23.6
  Bottom Layer w8: v1(3145,3613.5) 3148.07,3613.5 3430,3895.43 3430,4153.5 3485,4208.5 3555.32,4208.5 v1(3560.51,4213.7)
GPIO18: C44.2 U10.11 U23.8 | length 890.4
  Top Layer w8: C44.2 3109.08,3567.56 v1(3142.44,3567.56) U23.8
  Bottom Layer w8: v1(3142.44,3567.56) 3142.44,3567.87 3180,3605.43 3180,3623.5 3450,3893.5 3450,4138.5 3475,4163.5 v1(3560,4163.5)
GPIO19: R74.2 U10.13 U25.1 | length 1054.9
  Top Layer w8: R74.2 3531.67,3223.5 v1(3560,3223.5) 3592.67,3190.83 U25.1 ; v1(3535,3828.5) 3500,3863.5 3500,4036.72 3526.98,4063.7 U10.13
  Bottom Layer w8: v1(3535,3828.5) 3521.15,3814.65 3521.15,3442.35 3560,3403.5 v1(3560,3223.5)
GPIO20: FPC5.17 FPC6.5 U10.14 | length 1290.2
  Top Layer w8: U10.14 3575.32,4028.5 v1(3635,4028.5) 3800,4028.5 4065,4293.5 v1(4065,4313.5)
  Bottom Layer w8: FPC6.5 3570.39,4003.9 3595,4028.5 v1(3635,4028.5) ; v1(4065,4313.5) 4065,4303.5 4072.37,4296.13 FPC5.17
GPIO21: FPC6.2 R50.1 U10.23 | length 737
  Top Layer w8: U10.23 4033.9,3959.41 R50.1
  Bottom Layer w8: FPC6.2 3629.44,3537.95 4015,3923.5 4015,3948.5 v1(4030,3963.5)
GPIO45: U10.26
GPIO46: U10.16
LCDP: FPC5.9 FPC5.10 FPC6.1 Q1.2 | length 2238.8
  Bottom Layer w10: FPC6.1 3649.13,3502.64 4070,3923.5 4070,4083.5 4210.16,4223.66 FPC5.10 4210.16,4376.95 4229.84,4357.27 FPC5.9
  Bottom Layer w15: v2(3435,4838.5) 3435,4798.5 3665,4568.5 3925,4568.5 4080,4413.5 4173.61,4413.5 4210.16,4376.95
MICN: C55.1 U23.17 | length 1026.1
  Top Layer w8: v1(3205,3988.5) 3250.13,3988.5 C55.1 ; U23.17 3321.7,3551.81 3350,3523.5 v1(3390,3523.5)
  Bottom Layer w8: v1(3205,3988.5) 3175,3958.5 3175,3753.5 3080,3658.5 3080,3508.5 3105,3483.5 3195,3483.5 3235,3523.5 v1(3390,3523.5)
MICP: C54.1 U23.18 | length 922.8
  Top Layer w8: C54.1 3185.13,3958.5 v1(3205,3958.5) ; U23.18 3325.96,3567.55 3350,3543.5 v1(3370,3543.5)
  Bottom Layer w8: v1(3205,3958.5) 3205,3758.5 3095,3648.5 3095,3518.5 3115,3498.5 3185,3498.5 3230,3543.5 v1(3370,3543.5)
OUTN: C39.2 C47.2 C49.1 | length 405.4
  Top Layer w8: C39.2 3207.14,3136.36 3240,3103.5 3270.3,3103.5 ; C47.2 3294.24,3079.56 3270.3,3103.5 ; C49.1 3270.3,3103.5
OUTP: C40.2 C46.2 C48.1 | length 419.3
  Top Layer w8: v1(3060,3363.5) C40.2 ; C48.1 3286.06,3177.44 v1(3265,3198.5) 3265.3,3198.5 C46.2
  Bottom Layer w8: v1(3060,3363.5) 3060,3303.5 3165,3198.5 v1(3265,3198.5)
REST: C12.1 R1.1 U10.3 USB3.A5 USB3.B5 | length 1642.4
  Top Layer w8: C12.1 3398.2,4563.84 R1.1 U10.3@3560.36,4563.84 ; U10.3 U10.3@3560.36,4563.84 ; v1@4140,4563.5 v1(4139.66,4563.84) U10.3@3560.36,4563.84 ; USB3.A5 4694.01,4404.29 4698.22,4408.5 4725,4408.5 4740,4423.5 v1(4740,4462.61) 4740,4488.5 4715,4513.5 4705,4513.5 4696.1,4522.4 USB3.B5
  Bottom Layer w8: v1(4139.66,4563.84) 4614.66,4563.84 4685,4493.5 4709.11,4493.5 v1(4740,4462.61)
SDCLK: CARD1.5 U10.28 | length 1132.5
  Top Layer w8: v1(4370,4113.5) 4416.36,4113.5 4450,4079.86 4450,3787.14 4365,3702.14 4365,3343.5 4431.02,3277.48 CARD1.5
  Bottom Layer w8: v1(4249.49,4063.7) 4285.19,4063.7 4335,4113.5 v1(4370,4113.5)
SDCS: CARD1.1 U10.31 | length 1022.2
  Top Layer w8: U10.31 4314.81,4213.7 4370,4158.5 4435,4158.5 4495,4098.5 4495,3768.5 4410,3683.5 4410,3463.5 4422.79,3450.71 CARD1.1
SDMISO: CARD1.7 U10.29 | length 1169.7
  Top Layer w8: U10.29 4249.69,4113.5 4295,4113.5 4325,4083.5 4400,4083.5 4435,4048.5 4435,3793.36 4350,3708.36 4350,3274.78 4433.91,3190.86 CARD1.7
SDMOSI: CARD1.2 U10.30 | length 1030.5
  Top Layer w8: U10.30 4334.81,4163.7 4355,4143.5 4428.79,4143.5 4480,4092.29 4480,3774.72 4395,3689.72 4395,3438.5 4426.1,3407.4 CARD1.2
U0RX: U10.36 USB3.A7 USB3.B7 | length 485
  Top Layer w8: U10.36 4634.36,4463.7 ; USB3.A7@4657.02,4463.7 4634.36,4463.7 ; USB3.B7 4639.53,4423.97 4625,4438.5 4625,4453.5 4634.36,4462.87 4634.36,4463.7
U0TX: U10.37 USB3.A6 USB3.B6 | length 542.9
  Top Layer w8: U10.37 4284.81,4513.7 4315.47,4483.03 USB3.B6 4700.47,4483.03 4710,4473.5 4710,4455.08 4698.59,4443.66 USB3.A6
VCC: C16.2 C30.2 CARD1.4 Q1.3 R1.2 R50.2 R61.1 R63.2 R64.2 R67.2 R69.1 R71.1 R80.1 U10.2 U20.2 U20.4 U23.11 | length 6665.4
  Top Layer w8: U23.11 3197.65,3498.5 3070,3498.5 3040,3528.5 3040,3738.5 3090,3788.5 3170.86,3788.5 R69.1 3173.94,3801.11 3201.33,3828.5 3320,3828.5 v1(3385,3763.5) ; R71.1 v1(3484.48,3716.88) 3656.11,3888.5 v1(3900,3888.5) ; R1.2 3464.66,4593.5 C16.2 3505,4593.5 3525.2,4613.7 U10.2 4125.19,4613.7 4215,4703.5 4320,4703.5 4367.04,4750.54 R80.1 ; R67.2 4033.31,3841.46 R50.2 ; v1(4540,3898.5) 4602.16,3898.5 4660,3956.34 ; R64.2 4660,3956.34 ; R63.2 4748.07,4118.5 4700,4118.5 4660,4078.5 4660,3956.34
  Top Layer w10: U20.4 4166.27,3745.11 R61.1
  Top Layer w15: Q1.3 3300,4758.78 3300,4473.5 v1(3420,4353.5) ; v1(3900,3888.5) 3920,3888.5 3966.45,3842.05 R50.2 ; C30.2 v1(4085,3444.13) U20.2
  Top Layer w20: R50.2 4085,3790.95 U20.4
  Bottom Layer w8: v1(3385,3763.5) 3430,3718.5 v1@3485,3718.5 ; v1(3420,4353.5) 3420,4558.5 v1(3460,4598.5) ; v1(4085,3444.13) v1(4085,3723.5) ; v1@4310,3888.5 4320,3898.5 v1(4540,3898.5)
  Bottom Layer w15: v1(3420,4353.5) 3440,4333.5 3580,4333.5 3850,4063.5 3850,3908.5 3870,3888.5 v1(3900,3888.5) ; v1(4085,3444.13) 4208.35,3320.78 v1(4463.51,3320.78)
  other v1: 4313.28,3892.13
VDD_5V: C31.2 U21.4 USB3.A4B9 USB3.B4A9 | length 808.2
  Top Layer w8: U21.4 4908.2,4056.54 C31.2
  Top Layer w15: USB3.A4B9 4690.51,4359.01 4700,4368.5 4730,4368.5 4775,4323.5 ; USB3.B4A9 4690.51,4547.99 4700,4538.5 4725,4538.5 4775,4488.5 4775,4323.5 ; U21.4 4855,4071.53 4855,4163.5 4775,4243.5 4775,4323.5
VON: U25.5 VOI.2 | length 186.6
  Top Layer w15: U25.5 3944.45,3114.05 VOI.2
VOP: U25.8 VOI.1 | length 350.6
  Top Layer w15: U25.8 4022.67,3190.83 4085,3128.5 VOI.1
pads on no net: CARD1.8 CARD1.SW1 CARD1.SW2 FPC5.1 FPC5.2 FPC5.3 FPC5.4 FPC5.12 FPC5.19 FPC5.20 FPC6.7 FPC6.8 U10.24 U10.25 U10.32 U10.33 U10.34 U10.35

## Polygon pours and split planes (outlines as drawn)
GND on Top Layer "Top Layer-GND" (solid, remove dead copper, pour order 4): 3000,3000 4976.18,3000 4976.18,4968.5 3000,4968.5
AGND on Top Layer "Top Layer-AGND" (solid, remove dead copper, pour order 0): 3000,3043.5 3425,3043.5 3425,4205.07 3000,4205.07
AGND on Top Layer "Top Layer-AGND 1" (solid, remove dead copper, pour order 2): 3340.15,3038.5 3675,3038.5 3675,3280.83 3340.15,3280.83
AGND on Bottom Layer "Bottom Layer-AGND" (solid, remove dead copper, pour order 1): 3012.87,3038.5 3425,3038.5 3425,4205.07 3012.87,4205.07
GND on Bottom Layer "Bottom Layer-GND" (solid, remove dead copper, pour order 3): 3000,3000 4976.18,3000 4976.18,4968.5 3000,4968.5

## Keep-outs
Board Outline Layer:
  the board outline again, w10
Multi-Layer:
  region: 3551.52,4728.77 4260,4728.77 4260,4968.5 3551.52,4968.5

## Text inside footprints (layer, text, board x,y; h text height)
MIC3: Top Silkscreen Layer "+" at 3116.3,4380.1 h52.3